# Altium PCB PCB_3.PcbDoc (part 1 of 2)
Units mm, origin at the board's own origin, x right, y up, seen from the top; angles counter-clockwise.
Board outline 70 x 50 mm, 4 copper layers (Top Layer, Layer 1, Layer 2, Bottom Layer), stack 1.572 mm thick; 98 components, 78 nets, 374 pads, 168 vias.
Unrouted connection lines stored in the file: 79.
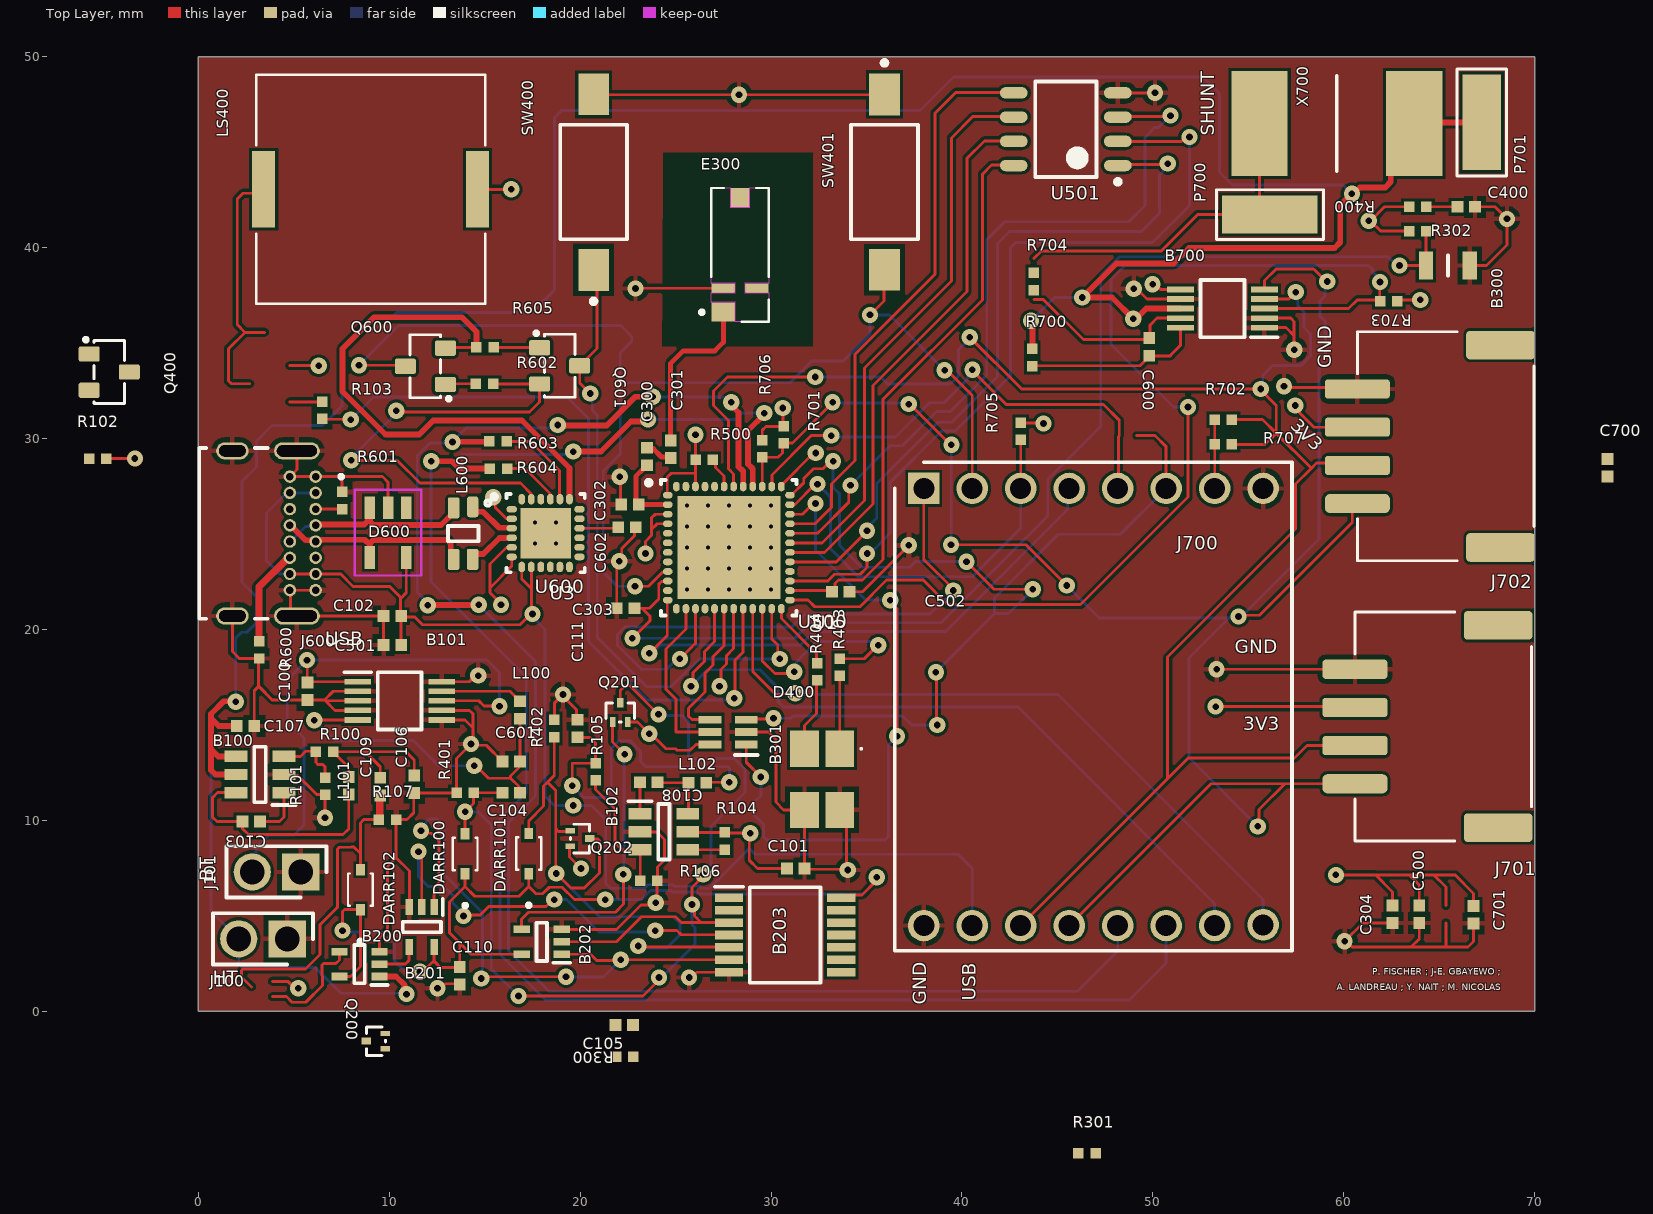
[diagram p0: Top Layer view]
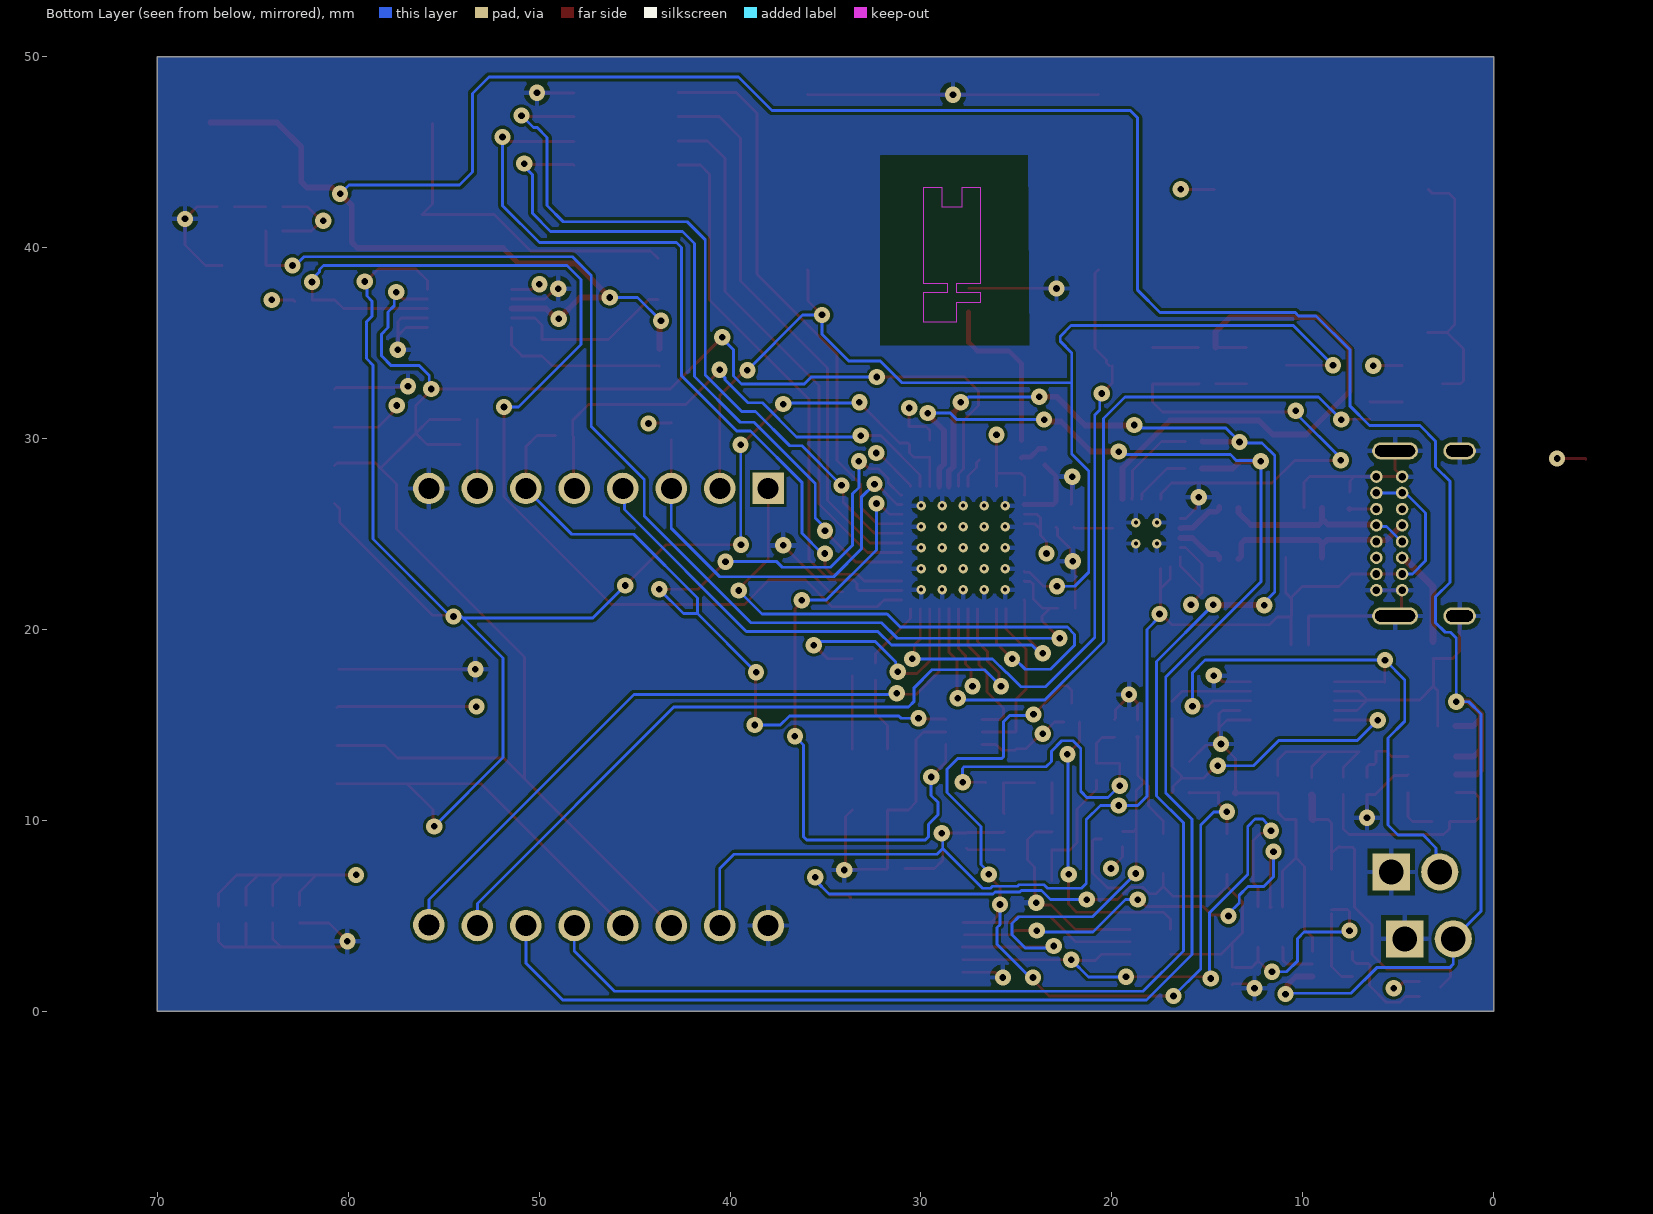
[diagram p1: Bottom Layer view, seen from below]
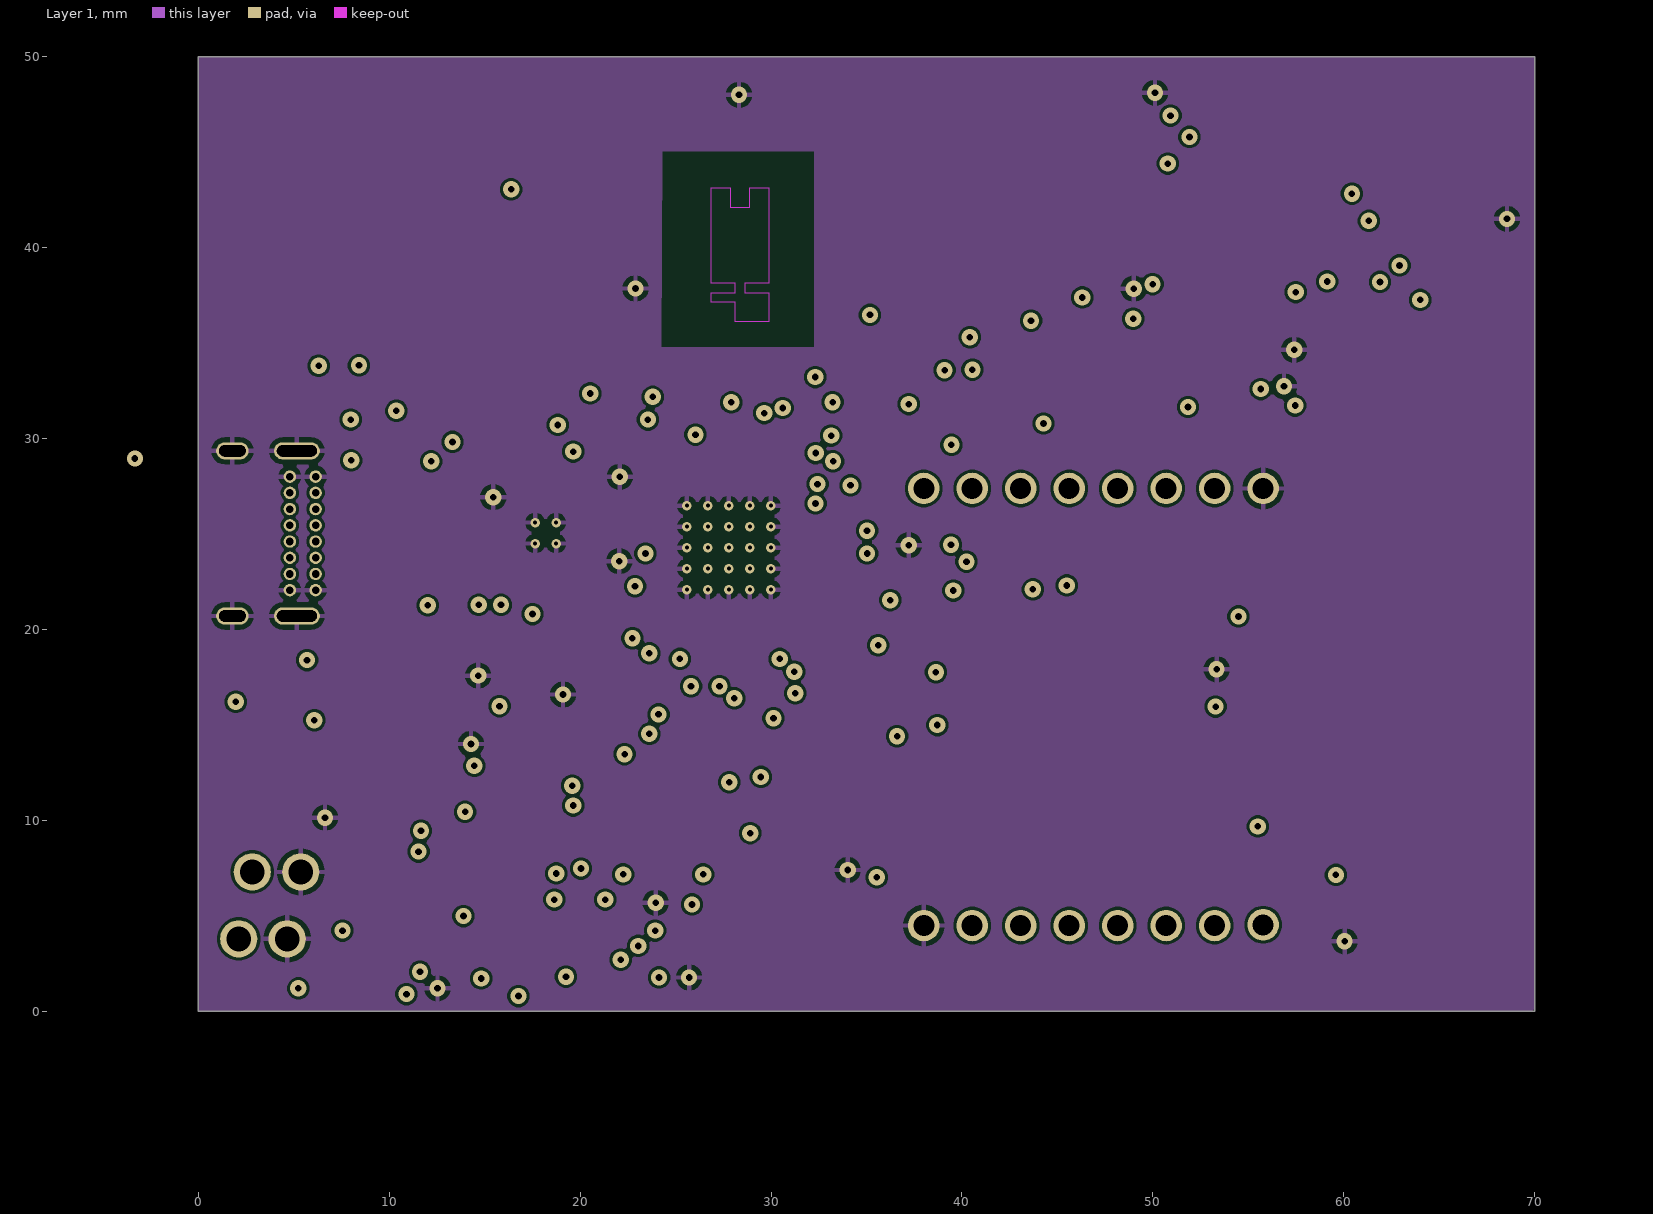
[diagram p2: Layer 1]
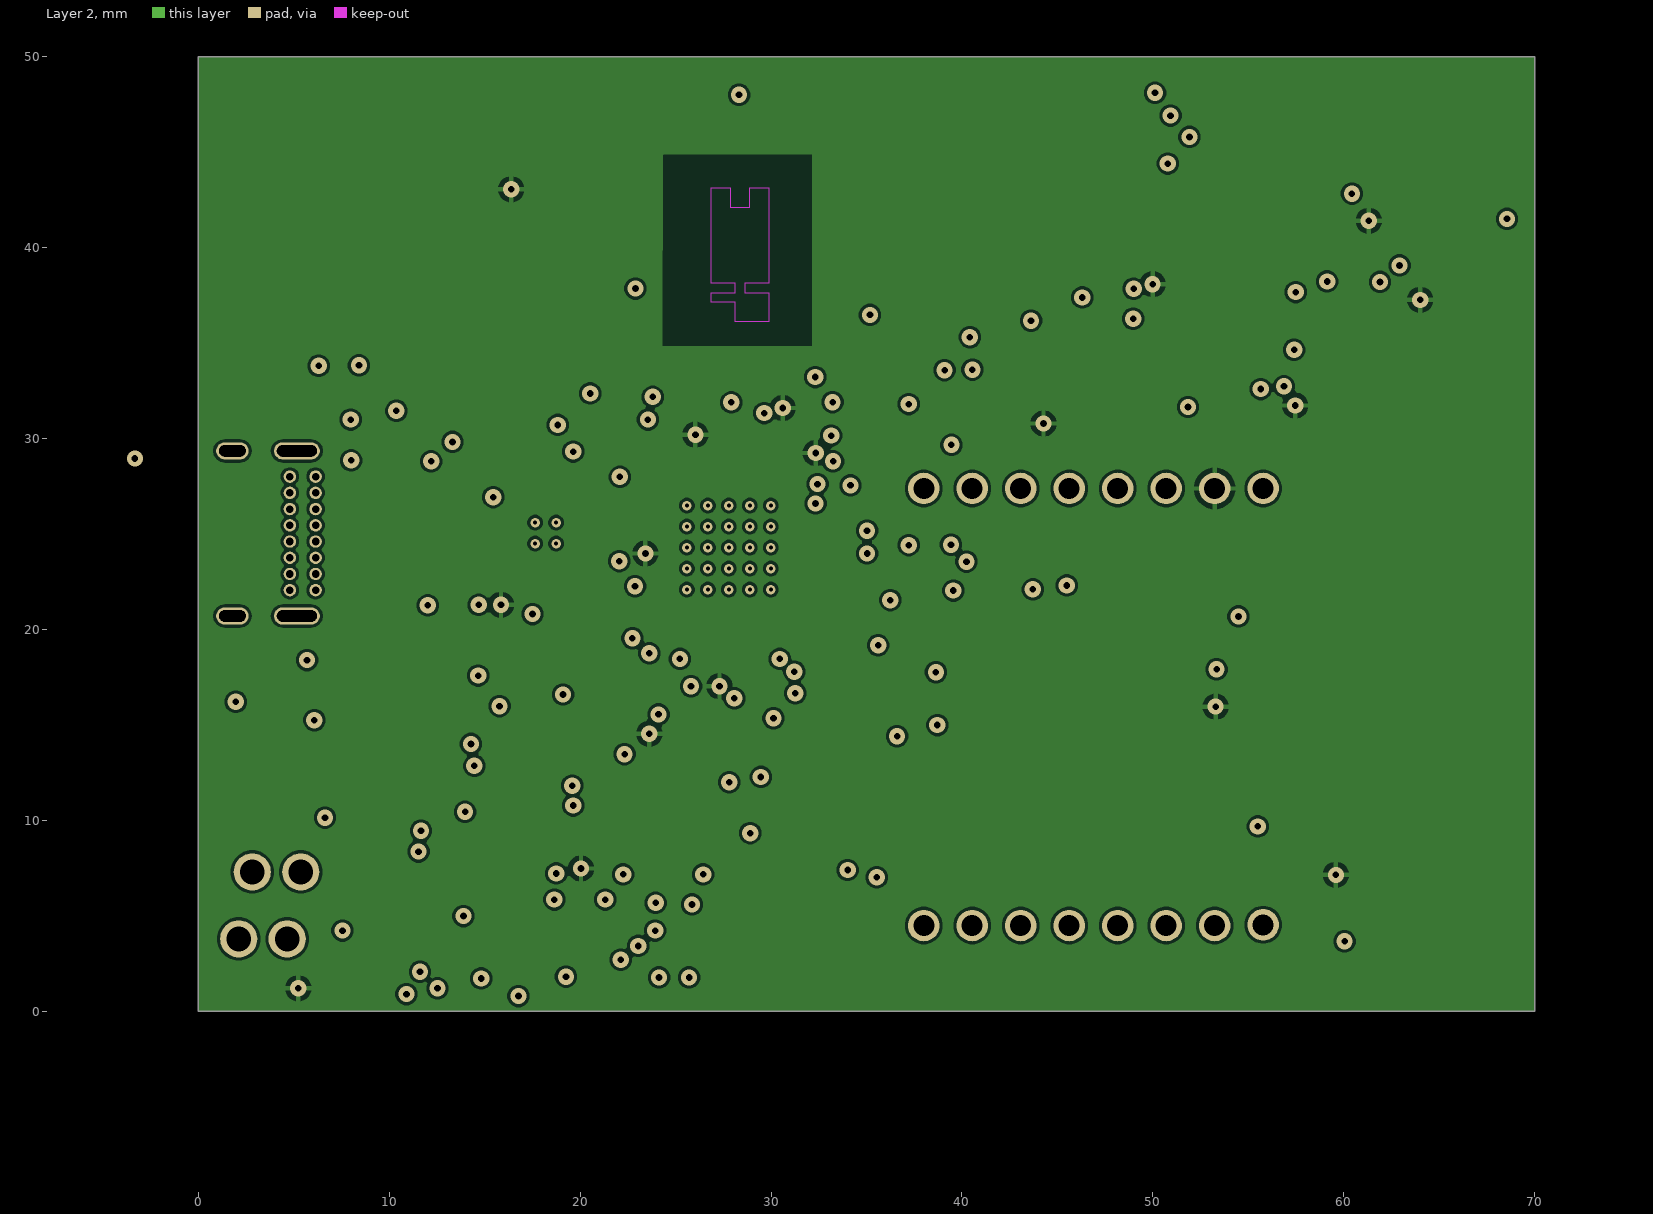
[diagram p3: Layer 2]

## Layer stack, top to bottom
Top Solder: solder mask 0.01, Solder Resist, Dk 3.5
Top Layer: signal copper 0.035
Dielectric 1: prepreg 0.1803, PP-021, Dk 4.7
Dielectric 2: prepreg 0.1803, PP-021, Dk 4.7
Layer 1: signal copper 0.035
Dielectric 3: core 0.711, Core-042, Dk 4.8
Layer 2: signal copper 0.035
Dielectric 4: prepreg 0.1803, PP-021, Dk 4.7
Dielectric 5: prepreg 0.1803, PP-021, Dk 4.7
Bottom Layer: signal copper 0.035
Bottom Solder: solder mask 0.01, Solder Resist, Dk 3.5

## Board outline
0,0 69.999,0 69.999,50 0,50

## Design rules (kind name [scope] priority, off if disabled: settings)
Clearance Clearance_OLTTTPPP [OnOutside] p1: gap=0.15 ignorepadtopadclearanceinfootprint=TRUE
Clearance Clearance_ILTTTPPP [All] p2: gap=0.15 ignorepadtopadclearanceinfootprint=TRUE except(0.09: Arc-SMDPad Track-SMDPad; 0.2: Arc-Hole Track-Hole SMDPad-Hole THPad-Hole Via-Hole Fill-Hole Poly-Hole Region-Hole)
DiffPairsRouting "Schematic Differential Pairs Routing_7" [InNet('FILTRE_D_6_P')] p1: maxlimit=0.127 minlimit=0.127 mostfreqgap=0.127 toplayer_minwidth=0.303 toplayer_maxwidth=0.303 toplayer_prefwidth=0.303 midlayer1_minwidth=0.109 midlayer1_maxwidth=0.109 midlayer1_prefwidth=0.109 midlayer2_minwidth=0.109 midlayer2_maxwidth=0.109 midlayer2_prefwidth=0.109 bottomlayer_minwidth=0.303 bottomlayer_maxwidth=0.303 bottomlayer_prefwidth=0.303 impedanceprofiledriven=TRUE impedanceprofileid={AF31A497-00BC-4CFA-BE3F-A0478A3B4F41} impedanceprofilevalue=90.000000 maxuncoupledlength=12.7
DiffPairsRouting "Schematic Differential Pairs Routing_6" [InNet('USB_D_6_P')] p2: maxlimit=0.127 minlimit=0.127 mostfreqgap=0.127 toplayer_minwidth=0.303 toplayer_maxwidth=0.303 toplayer_prefwidth=0.303 midlayer1_minwidth=0.109 midlayer1_maxwidth=0.109 midlayer1_prefwidth=0.109 midlayer2_minwidth=0.109 midlayer2_maxwidth=0.109 midlayer2_prefwidth=0.109 bottomlayer_minwidth=0.303 bottomlayer_maxwidth=0.303 bottomlayer_prefwidth=0.303 impedanceprofiledriven=TRUE impedanceprofileid={AF31A497-00BC-4CFA-BE3F-A0478A3B4F41} impedanceprofilevalue=90.000000 maxuncoupledlength=12.7
DiffPairsRouting "Schematic Differential Pairs Routing_5" [InNet('USB_D_6_N')] p3: maxlimit=0.127 minlimit=0.127 mostfreqgap=0.127 toplayer_minwidth=0.303 toplayer_maxwidth=0.303 toplayer_prefwidth=0.303 midlayer1_minwidth=0.109 midlayer1_maxwidth=0.109 midlayer1_prefwidth=0.109 midlayer2_minwidth=0.109 midlayer2_maxwidth=0.109 midlayer2_prefwidth=0.109 bottomlayer_minwidth=0.303 bottomlayer_maxwidth=0.303 bottomlayer_prefwidth=0.303 impedanceprofiledriven=TRUE impedanceprofileid={AF31A497-00BC-4CFA-BE3F-A0478A3B4F41} impedanceprofilevalue=90.000000 maxuncoupledlength=12.7
DiffPairsRouting "Schematic Differential Pairs Routing_4" [InNet('FILTRE_D_6_N')] p4: maxlimit=0.127 minlimit=0.127 mostfreqgap=0.127 toplayer_minwidth=0.303 toplayer_maxwidth=0.303 toplayer_prefwidth=0.303 midlayer1_minwidth=0.109 midlayer1_maxwidth=0.109 midlayer1_prefwidth=0.109 midlayer2_minwidth=0.109 midlayer2_maxwidth=0.109 midlayer2_prefwidth=0.109 bottomlayer_minwidth=0.303 bottomlayer_maxwidth=0.303 bottomlayer_prefwidth=0.303 impedanceprofiledriven=TRUE impedanceprofileid={AF31A497-00BC-4CFA-BE3F-A0478A3B4F41} impedanceprofilevalue=90.000000 maxuncoupledlength=12.7
DiffPairsRouting [All] p5: maxlimit=0.254 minlimit=0.254 mostfreqgap=0.254 toplayer_minwidth=0.381 toplayer_maxwidth=0.381 toplayer_prefwidth=0.381 midlayer1_minwidth=0.381 midlayer1_maxwidth=0.381 midlayer1_prefwidth=0.381 midlayer2_minwidth=0.381 midlayer2_maxwidth=0.381 midlayer2_prefwidth=0.381 bottomlayer_minwidth=0.381 bottomlayer_maxwidth=0.381 bottomlayer_prefwidth=0.381 maxuncoupledlength=12.7
HoleSize [All] p1: absolutevalues=TRUE maxlimit=1000 minlimit=0.2 maxpercent=80.000 minpercent=20.000
HoleToHoleClearance HoleToHoleClearance_uVia_same_layer_inner [IsMicroVia and ((StartLayer = 'Inner 1') and (StopLayer = 'Inner 2')) vs IsMicroVia and ((StartLayer = 'Inner 1') and (StopLayer = 'Inner 2'))] p1: gap=0.2 allowstackedmicrovias=FALSE
HoleToHoleClearance HoleToHoleClearance_uVia_same_layer_top [IsMicroVia and ((StartLayer = 'Top Layer') and (StopLayer = 'Inner 1')) vs IsMicroVia and ((StartLayer = 'Top Layer') and (StopLayer = 'Inner 1'))] p2: gap=0.2 allowstackedmicrovias=FALSE
HoleToHoleClearance HoleToHoleClearance_uVia [IsMicroVia vs IsMicroVia] p3: gap=0.01 allowstackedmicrovias=FALSE
HoleToHoleClearance [All] p4: gap=0.2 allowstackedmicrovias=FALSE
MinimumAnnularRing MinimumAnnularRing_uVia [IsMicroVia] p1: minimumring=0.09
MinimumAnnularRing MinimumAnnularRing_OAR [OnOutside] p2: minimumring=0.125
MinimumAnnularRing MinimumAnnularRing_IAR [All] p3: minimumring=0.125
MinimumSolderMaskSliver [All] p1: minsoldermaskwidth=0.149
NetAntennae [All] p1: netantennaetolerance=10
PolygonConnect [All] p1: connectstyle=Relief reliefconductorwidth=0.254 reliefentries=4 polygonreliefangle="90 Angle" airgapwidth=0.254
RoutingVias [All] p1: holewidth=0.35 width=0.85 viastyle="Through Hole" minholewidth=0.34 minwidth=0.84 maxholewidth=0.36 maxwidth=0.86
RoutingVias RoutingVias_uVia [IsMicroVia] p2: holewidth=0.1 width=0.28 viastyle="Through Hole" minholewidth=0.1 minwidth=0.28 maxholewidth=0.1 maxwidth=0.28
SilkToSolderMaskClearance [IsPad] p1: minsilkscreentomaskgap=0.124 clearancetoexposedcopper=TRUE
SolderMaskExpansion [All] p1: expansion=0 istentingtop=FALSE
SupplyNets "Schematic Supply Nets_11" [InNet('NOT_3V3_USB')] p1: voltage=0.000
SupplyNets "Schematic Supply Nets_10" [InNet('USB')] p2: voltage=0.000
SupplyNets "Schematic Supply Nets_9" [InNet('GND')] p3: voltage=0.000
SupplyNets "Schematic Supply Nets_8" [InNet('BT')] p4: voltage=0.000
SupplyNets "Schematic Supply Nets_7" [InNet('3V3_Logique')] p5: voltage=0.000
SupplyNets "Schematic Supply Nets_6" [InNet('VDDA')] p6: voltage=0.000
SupplyNets "Schematic Supply Nets_5" [InNet('3V3_BT')] p7: voltage=0.000
SupplyNets "Schematic Supply Nets_4" [InNet('3V3_HT')] p8: voltage=0.000
SupplyNets "Schematic Supply Nets_3" [InNet('3V3_USB')] p9: voltage=0.000
SupplyNets "Schematic Supply Nets_2" [InNet('NOT_3V3_BT')] p10: voltage=0.000
SupplyNets "Schematic Supply Nets_1" [InNet('HT')] p11: voltage=0.000
SupplyNets "Schematic Supply Nets" [InNet('3V3')] p12: voltage=0.000
ViasUnderSMD [IsMicroVia] p1: allowed=TRUE
Width "Schematic Width Constraint_1" [InNet('NetC300_2')] p1: maxlimit=0.624 minlimit=0.352 preferedwidth=0.624 toplayer_minwidth=0.624 impedanceprofiledriven=TRUE impedanceprofileid={634E063D-215B-4283-ACFF-58841ED45AF4} impedanceprofilevalue=50.000000 minimp=50.000000 maximp=50.000000 favimp=50.000000 checkconnectedcopper=TRUE
Width "Schematic Width Constraint" [InNet('NetC301_2')] p2: maxlimit=0.624 minlimit=0.352 preferedwidth=0.624 toplayer_minwidth=0.624 impedanceprofiledriven=TRUE impedanceprofileid={634E063D-215B-4283-ACFF-58841ED45AF4} impedanceprofilevalue=50.000000 minimp=50.000000 maximp=50.000000 favimp=50.000000 checkconnectedcopper=TRUE
Width Width_ILTW [All] p3: maxlimit=3 minlimit=0.15 preferedwidth=0.15
24 further rules are at their usual default settings.

## Classes and differential pairs
component class USB: C601 C602 C700 D600 J600 L600 Q600 Q601 R600 R601 R602 R603 R604 R605 U600
component class Logique_Prio_Alim: B200 B201 B202 B203 Q200 Q201 Q202
component class IHM: C400 D400 LS400 Q400 R400 R401 R402 R403 R404 SW400 SW401
component class I2C: B700 C600 C701 J700 J701 J702 P700 P701 R700 R701 R702 R703 R704 R705 R706 R707 X700
component class ESP32_SRAM: C500 C501 C502 R500 U500 U501
component class Converti_Alim: B100 B101 B102 C100 C101 C102 C103 C104 C105 C106 C107 C108 C109 C110 C111 DARR100 DARR101 DARR102 J100 J101 L100 L101 L102 R100 R101 R102 R103 R104 R105 R106 R107
component class Capteurs_et_Antenne: B300 B301 C300 C301 C302 C303 C304 E300 R300 R301 R302
differential pair USB_D_6: +USB_D_6_P -USB_D_6_N
differential pair FILTRE_D_6: +FILTRE_D_6_P -FILTRE_D_6_N

## Components (designator, comment, footprint, x,y, rotation, side; value= is the part's Value field where it differs from the comment)
B100 "LMR50410Y3FQDBVRQ1" SOT95P280X145-6N 3.226,12.395 r180 top
B101 "TPS62056DGSG4" SOP50P490X110-10N 10.541,16.256 r0 top
B102 "LMR50410Y3FQDBVRQ1" SOT95P280X145-6N 24.384,9.398 r0 top
B200 "MC74VHC1GT08DFT2G" SOT65P210X110-5N 8.433,2.464 r180 top
B201 "MC74VHC1GT08DFT2G" SOT65P210X110-5N 11.699,4.403 r270 top
B202 "MC74VHC1GT08DFT2G" SOT65P210X110-5N 17.983,3.632 r180 top
B203 "74VHC05FT" SOP65P640X120-14N 30.734,3.988 r0 top
B300 "NB12K00103JBB" RESC2212X50N 65.456,39.065 r0 top (schematic designator B400)
B301 "TMP126DCKR" SOT65P210X110-6N 27.747,14.62 r180 top (schematic designator B401)
B700 "INA237AIDGST" SOP50P490X110-10N 53.645,36.805 r180 top
C100 "10µF" CAPC1005X06N 5.715,16.764 r270 top
C101 "2.2µF" CAPC1005X06N 31.293,7.468 r0 top
C102 "22µF" CAPC1005X06N 10.16,20.701 r180 top
C103 "0.1µF" CAPC1005X06N 2.766,9.931 r180 top
C104 "0.01F" CAPC1005X06N 16.383,11.438 r180 top
C105 "0.01F" CAPC1005X06N 22.301,-0.737 r180 top
C106 "10µF" CAPC1005X06N 11.303,11.89 r270 top
C107 "2.2µF" CAPC1005X06N 2.464,14.935 r0 top
C108 "0.1µF" CAPC1005X06N 23.597,11.989 r0 top
C109 "0.01F" CAPC1005X06N 9.525,11.763 r270 top
C110 "10µF" CAPC1005X06N 13.691,1.854 r270 top
C111 "10µF" CAPC1005X06N 19.863,14.808 r90 top
C300 "0.6pF" CAPC1005X06N 23.495,29.058 r270 top
C301 "0.9pF" CAPC1005X06N 24.74,29.439 r90 top (schematic designator C400)
C302 "1pF" CAPC1005X06N 22.606,26.543 r0 top (schematic designator C401)
C303 "10nF" CAPC1005X06N 22.377,21.107 r180 top (schematic designator C402)
C304 "0.1µF" CAPC1005X06N 62.56,5.074 r270 top (schematic designator C403)
C400 "1µF" CAPC1005X06N 66.421,42.139 r0 top (schematic designator C404)
C500 "10µF" CAPC1005X06N 63.957,5.074 r270 top
C501 "100nF" CAPC1005X06N 10.16,19.177 r180 top
C502 "100nF" CAPC1005X06N 33.655,21.971 r0 top
C600 "100nF" CAPC1005X06N 49.809,34.798 r90 top
C601 "22µF" CAPC1005X06N 16.383,13.081 r180 top
C602 "4.7µF" CAPC1005X06N 22.454,25.349 r0 top
C700 "100nF" CAPC1005X06N 73.812,28.473 r90 top
C701 "100nF" CAPC1005X06N 66.802,5.055 r270 top
D400 "598-8610-207F" 5988610207F 32.675,12.141 r270 top (schematic designator D300)
D600 "824011" 824011 9.931,25.07 r180 top
DARR100 "SD103AWS-7-F" SD103AWS-7-F 13.97,8.238 r90 top
DARR101 "SD103AWS-7-F" SD103AWS-7-F 17.302,8.255 r90 top
DARR102 "SD103AWS-7-F" SD103AWS-7-F 8.484,6.359 r90 top
E300 "NN03-320" XCVR_NN03-320 28.372,39.624 r270 top (schematic designator E400)
J100 "61300211121" 61300211121 4.648,3.785 r180 top
J101 "61300211121" 61300211121 5.359,7.29 r180 top
J600 "Use" USB4085-GF-A 1.778,25.026 r270 top locked
J700 "825433-8" Connect-Mikrobus 37.998,27.381 r0 top
J701 "114020164" 114020164 64.389,14.91 r90 top
J702 "114020164" 114020164 64.516,29.591 r90 top
L100 "10µH" LQPC1005X06N 19.634,12.982 r270 top
L101 "3.3µH" LQPC1005X06N 5.08,14.605 r90 top
L102 "3.3µH" LQPC1005X06N 28.933,14.757 r0 top
L600 "Filtre en mode commun" 744232090 13.868,25.019 r270 top
LS400 "PKLCS1212E40A1-R1" SPKR_PKLCS1212E40A1-R1 9.017,43.053 r180 top (schematic designator LS300)
P700 "Plage CMS 10x5" "Plage CMS 10x5" 56.134,41.732 r180 top
P701 "Plage CMS 10x5" "Plage CMS 10x5" 67.234,46.558 r270 top
Q200 "SI3139K-TP" SI3139K-TP 9.296,-1.575 r90 top
Q201 "SI3139K-TP" SI3139K-TP 22.098,15.646 r0 top
Q202 "SI3139K-TP" SI3139K-TP 19.99,9.042 r270 top
Q400 "SS8050-G" SS8050-G -4.674,33.477 r270 top (schematic designator Q300)
Q600 "SS8050-G" SS8050-G 11.887,33.782 r90 top
Q601 "SS8050-G" SS8050-G 18.923,33.807 r270 top
R100 "51kΩ" RESC1005X06N 6.604,13.589 r180 top
R101 "22.1kΩ" RESC1005X06N 6.629,11.786 r90 top
R102 "1kΩ" RESC1005X06N -5.283,28.931 r0 top
R103 "1kΩ" RESC1005X06N 6.477,31.471 r90 top
R104 "100k" RESC1005X06N 27.584,8.915 r270 top
R105 "51kΩ" RESC1005X06N 20.803,12.548 r270 top
R106 "22.1kΩ" RESC1005X06N 23.597,6.833 r180 top
R107 "1kΩ" RESC1005X06N 9.906,10.033 r180 top
R300 "10kΩ" RESC1005X06N 22.327,-2.388 r0 top
R301 "10kΩ" RESC1005X06N 46.551,-7.442 r0 top
R302 "10kΩ" RESC1005X06N 63.881,40.869 r0 top
R400 "10kΩ" RESC1005X06N 63.881,42.139 r180 top (schematic designator R303)
R401 "1kΩ" RESC1005X06N 13.97,11.438 r0 top (schematic designator R304)
R402 "1kΩ" RESC1005X06N 18.644,14.808 r270 top (schematic designator R400)
R403 "330Ω" RESC1005X06N 33.604,18.009 r270 top (schematic designator R401)
R404 "330Ω" RESC1005X06N 32.41,17.78 r270 top (schematic designator R402)
R500 "0Ω" RESC1005X06N 26.492,28.88 r0 top
R600 "5.1kΩ" RESC1005X06N 3.175,18.923 r90 top
R601 "5.1kΩ" RESC1005X06N 7.544,26.746 r270 top
R602 "12kΩ" RESC1005X06N 14.986,32.868 r0 top
R603 "470Ω" RESC1005X06N 15.697,29.845 r0 top
R604 "470Ω" RESC1005X06N 15.723,28.423 r0 top
R605 "12kΩ" RESC1005X06N 15.011,34.773 r180 top
R700 "10Ω" RESC1005X06N 43.688,34.239 r90 top
R701 "4.7kΩ" RESC1005X06N 30.658,30.201 r270 top
R702 "4.7kΩ" RESC1005X06N 53.696,30.988 r0 top
R703 "10kΩ" RESC1005X06N 62.357,37.186 r0 top
R704 "10Ω" RESC1005X06N 43.764,38.227 r90 top
R705 "100kΩ" RESC1005X06N 43.078,30.378 r90 top
R706 "2kΩ" RESC1005X06N 29.54,29.464 r270 top
R707 "2kΩ" RESC1005X06N 53.696,29.693 r0 top
SW400 "FSMSM" TECO-FSMSM-2_V 20.701,43.434 r90 top (schematic designator SW300)
SW401 "FSMSM" TECO-FSMSM-2_V 35.941,43.434 r270 top (schematic designator SW301)
U500 "ESP32-PICO-D4" PQFN50P700X700X104_HS-49N 27.788,24.282 r0 top
U501 "IS66WVS1M8BLL-104NLI" SOIC127P600X175-8N 45.441,46.203 r180 top
U600 "CP2104-F03-GM" PQFN50P400X400X80_HS-25N 18.186,25.044 r0 top
X700 "PSR400ITQFF0L50" RESC10052X200N 59.639,46.507 r0 top

## Footprints (in the part's own frame and the unit in brackets; to place one, negate y for a bottom-side part, rotate by r counter-clockwise, add the part's x,y. Pads: shape width x height; smd on the part's side, far side on the other; paste and mask are expansions set on the pad)
824011 [mil] "Suppresseurs ESD / diodes TVS WE-TVS High Speed 5uA 5VDC 2+1"
  rect 21.65x47.24 smd: 1(-37.4,-51.18) 2(0,-51.18) 3(37.4,-51.18) 4(37.4,51.18) 5(-37.5,51)
  Top Layer keep-out lines w5: 68.9,88.58 -68.9,88.58 -68.9,-88.58 68.9,-88.58 68.9,88.58
  body extent -57,-55 57,55, height 57
114020164 [mm]
  rrect50% 1x3.4 smd: 1(-3,3.8)
  rrect30% 1x3.4 smd: 2(-1,3.8) 3(1,3.8) 4(3,3.8)
  rrect26% 1.5x3.6 smd: MP1(-5.3,-3.7) MP2(5.3,-3.7)
  silkscreen extent -6,-5.45 6,3.8, body extent -6.1,-5.59 5.9,4.59, height 5.2
744232090 [mm]
  rrect50% 1.1x0.6 smd: 1(-1.4,0.5)
  rrect33% 1.1x0.6 smd: 2(1.35,0.5) 3(1.35,-0.5) 4(-1.35,-0.5)
  silkscreen extent -1.74,-0.8 0.4,1.44, body extent -1.6,-0.8 1.6,0.8, height 1.8
5988610207F [mm]
  rect 1.9x1.5 smd: 1(-1.6,0.925) 2(1.6,0.925) 3(-1.6,-0.925) 4(1.6,-0.925)
  silkscreen extent -1.65,2 -1.55,2.1, body extent -1.6,-1.35 1.6,1.35, height 0.9
61300211121 [mm] "Embases et logements de câbles WR-PHD 2.54mm 2Pin T HT Header"
  rect 1.95x1.95 / inner round 1.95 / far side rect 1.95x1.95 hole 1.3: 1(0,0)
  round 1.95 hole 1.3: 2(2.54,0)
  silkscreen extent -1.35,-1.35 3.89,1.35
CAPC1005X06N [mm] "Chip Capacitor, 2-Leads, Body 1,00x0,50mm, IPC Medium Density"
  rect 0.62x0.62 smd: 1(-0.46,0) 2(0.46,0)
  body extent -0.53,-0.28 0.53,0.28, height 0.55
Connect-Mikrobus [mm]
  rect 1.65x1.65 / inner round 1.65 / far side rect 1.65x1.65 hole 1.1: 1(0,0)
  round 1.65 hole 1.1: 2(2.54,0) 3(5.08,0) 4(7.62,0) 5(10.16,0) 6(12.7,0) 7(15.24,0) 8(17.78,0) 9(17.78,-22.86) 10(15.24,-22.9) 11(12.7,-22.9) 12(10.16,-22.9) 13(7.62,-22.9) 14(5.08,-22.9) 15(2.54,-22.9) 16(0,-22.9)
  silkscreen extent -1.52,-24.22 19.3,1.37, body extent -1.37,-24.18 19.14,1.28, height 6.7
LQPC1005X06N [mm]
  rect 0.62x0.62 smd: 1(-3.254,-2.794) 2(-2.334,-2.794)
  body extent -3.32,-3.07 -2.27,-2.52, height 0.55
"Plage CMS 10x5" [mm] "Plage CMS 10x5"
  rect 5x2 smd paste-1 mask+0.15: 1(0,0)
  silkscreen extent -2.8,-1.3 2.8,1.3
PQFN50P400X400X80_HS-25N [mm] "PQFN, 24-Leads, Body 4,00x4,00mm, Pitch 0,50mm, Thermal Pad 2,65x2,65mm, IPC Medium Density"
  oval 0.55x0.35 smd: 1(-1.775,1.25) 2(-1.775,0.75) 3(-1.775,0.25) 4(-1.775,-0.25) 5(-1.775,-0.75) 6(-1.775,-1.25) 13(1.775,-1.25) 14(1.775,-0.75) 15(1.775,-0.25) 16(1.775,0.25) 17(1.775,0.75) 18(1.775,1.25)
  oval 0.35x0.55 smd: 7(-1.25,-1.775) 8(-0.75,-1.775) 9(-0.25,-1.775) 10(0.25,-1.775) 11(0.75,-1.775) 12(1.25,-1.775) 19(1.25,1.775) 20(0.75,1.775) 21(0.25,1.775) 22(-0.25,1.775) 23(-0.75,1.775) 24(-1.25,1.775)
  rect 2.65x2.65 smd: 25(0,0)
  silkscreen extent -2.82,-2.05 2.05,2.05, body extent -2.05,-2.05 2.05,2.05, height 0.8
PQFN50P700X700X104_HS-49N [mm] "PQFN, 48-Leads, Body 7,00x7,00mm, Pitch 0,50mm, Thermal Pad 5,40x5,40mm, IPC Medium Density"
  oval 0.5x0.35 smd: 1(-3.2,2.75) 2(-3.2,2.25) 3(-3.2,1.75) 4(-3.2,1.25) 5(-3.2,0.75) 6(-3.2,0.25) 7(-3.2,-0.25) 8(-3.2,-0.75) 9(-3.2,-1.25) 10(-3.2,-1.75) 11(-3.2,-2.25) 12(-3.2,-2.75) 25(3.2,-2.75) 26(3.2,-2.25) 27(3.2,-1.75) 28(3.2,-1.25) 29(3.2,-0.75) 30(3.2,-0.25) 31(3.2,0.25) 32(3.2,0.75) 33(3.2,1.25) 34(3.2,1.75) 35(3.2,2.25) 36(3.2,2.75)
  oval 0.35x0.5 smd: 13(-2.75,-3.2) 14(-2.25,-3.2) 15(-1.75,-3.2) 16(-1.25,-3.2) 17(-0.75,-3.2) 18(-0.25,-3.2) 19(0.25,-3.2) 20(0.75,-3.2) 21(1.25,-3.2) 22(1.75,-3.2) 23(2.25,-3.2) 24(2.75,-3.2) 37(2.75,3.2) 38(2.25,3.2) 39(1.75,3.2) 40(1.25,3.2) 41(0.75,3.2) 42(0.25,3.2) 43(-0.25,3.2) 44(-0.75,3.2) 45(-1.25,3.2) 46(-1.75,3.2) 47(-2.25,3.2) 48(-2.75,3.2)
  rect 5.4x5.4 smd: 49(0,0)
  silkscreen extent -4.32,-3.55 3.55,3.55, body extent -3.55,-3.55 3.55,3.55, height 1.04
RESC1005X06N [mm] "Chip Resistor, 2-Leads, Body 1,00x0,50mm, IPC Medium Density"
  rect 0.55x0.55 smd: 1(-0.45,0) 2(0.45,0)
  body extent -0.53,-0.28 0.53,0.28, height 0.55
RESC2212X50N [mm]
  rect 0.75x1.45 smd: 1(-1.15,0) 2(1.15,0)
  silkscreen extent 0,-0.53 0,0.53, body extent -1.07,-0.63 1.07,0.63, height 0.5
RESC10052X200N [mm]
  rect 2.95x5.5 smd: 1(-4.05,0) 2(4.05,0)
  silkscreen extent 0,-2.5 0,2.5, body extent -5,-2.6 5,2.6, height 2
SD103AWS-7-F [mm]
  rect 0.6x0.46 smd: 1(-1.05,0) 2(1.05,0)
  silkscreen extent -2.81,-0.65 0.85,0.65, body extent -1.25,-0.65 1.25,0.65, height 1.2
SI3139K-TP [mm] "MOSFET P-Channel MOSFET"
  rect 0.28x0.5 smd paste+0 mask+0.075: 1(-0.4,-0.5) 2(0.4,-0.5)
  rect 0.36x0.5 smd paste+0 mask+0.075: 3(0,0.5)
  silkscreen extent -0.75,-0.5 0.75,0.5, body extent -0.6,-0.6 0.6,0.6, height 0.55
SOIC127P600X175-8N [mm] "SOIC, 8-Leads, Body 4,90x3,90mm, Pitch 1,27mm, IPC Medium Density"
  oval 1.45x0.6 smd: 1(-2.725,1.905) 2(-2.725,0.635) 3(-2.725,-0.635) 4(-2.725,-1.905) 5(2.725,-1.905) 6(2.725,-0.635) 7(2.725,0.635) 8(2.725,1.905)
  silkscreen extent -2.85,-2.5 1.6,2.88, body extent -3,-2.5 3,2.5, height 1.75
SOP50P490X110-10N [mm]
  rect 1.4x0.3 smd: 1(-2.2,1) 2(-2.2,0.5) 3(-2.2,0) 4(-2.2,-0.5) 5(-2.2,-1) 6(2.2,-1) 7(2.2,-0.5) 8(2.2,0) 9(2.2,0.5) 10(2.2,1)
  silkscreen extent -2.9,-1.5 1.15,1.5, body extent -2.46,-1.5 2.46,1.5, height 1.06
SOP65P640X120-14N [mm]
  rect 1.475x0.45 smd: 1(-2.938,1.95) 2(-2.938,1.3) 3(-2.938,0.65) 4(-2.938,0) 5(-2.938,-0.65) 6(-2.938,-1.3) 7(-2.938,-1.95) 8(2.938,-1.95) 9(2.938,-1.3) 10(2.938,-0.65) 11(2.938,0) 12(2.938,0.65) 13(2.938,1.3) 14(2.938,1.95)
  silkscreen extent -3.68,-2.5 1.85,2.52, body extent -3.1,-2.75 3.3,2.75, height 1.1
SOT65P210X110-5N [mm]
  rect 0.85x0.4 smd: 1(-1.05,0.65) 2(-1.05,0) 3(-1.05,-0.65) 4(1.05,-0.65) 5(1.05,0.65)
  silkscreen extent -1.47,-1 0.28,1.1, body extent -0.95,-1 1.15,1, height 1.1
SOT65P210X110-6N [mm]
  rect 1.2x0.4 smd: 1(-0.95,0.65) 2(-0.95,0) 3(-0.95,-0.65) 4(0.95,-0.65) 5(0.95,0) 6(0.95,0.65)
  silkscreen extent -1.55,1.2 -0.35,1.2, body extent -1.05,-1 1.05,1, height 1
SOT95P280X145-6N [mm]
  rect 1.2x0.6 smd: 1(-1.25,0.95) 2(-1.25,0) 3(-1.25,-0.95) 4(1.25,-0.95) 5(1.25,0) 6(1.25,0.95)
  silkscreen extent -1.85,-1.45 0.3,1.6, body extent -1.4,-1.45 1.4,1.45, height 1.2
SPKR_PKLCS1212E40A1-R1 [mm]
  rect 1.2x4 smd: N(5.6,0) P(-5.6,0)
  silkscreen extent -6,-6 6,6, body extent -6,-6 6,6, height 3
SS8050-G [mm]
  rrect25% 0.8x1.1 smd paste+0 mask+0.075: 1(-0.95,-1.05) 2(0.95,-1.05) 3(0,1.05)
  silkscreen extent -1.77,-1.3 1.65,0.8, body extent -1.5,-1.3 1.5,1.3, height 1.1
TECO-FSMSM-2_V [mm] "SMD, 2-Leads, Body 6x3.5mm, Pitch 9.19mm"
  rect 2.2x1.6 smd: 1(-4.595,0)
  rect 2.18x1.6 smd: 2(4.595,0)
  silkscreen extent -6.37,-1.75 3,1.75, body extent -4.98,-1.75 4.98,1.75, height 4.4
USB4085-GF-A [mm]
  round 0.65 hole 0.4: A1(-2.975,4.36) A4(-2.125,4.36) A5(-1.275,4.36) A6(-0.425,4.36) A7(0.425,4.36) A8(1.275,4.36) A9(2.125,4.36) A12(2.975,4.36) B1(2.975,3.01) B4(2.125,3.01) B5(1.275,3.01) B6(0.425,3.01) B7(-0.425,3.01) B8(-1.275,3.01) B9(-2.125,3.01) B12(-2.975,3.01)
  oval 0.9x1.7 hole 0.6 slot 1.4 at 90 deg: S1(-4.325,0) S2(4.325,0)
  oval 0.9x2.4 hole 0.6 slot 2.1 at 90 deg: S3(-4.325,3.38) S4(4.325,3.38)
  silkscreen extent -4.47,-1.74 4.47,5.8, body extent -4.47,-4.25 4.47,4.92, height 3.46
XCVR_NN03-320 [mm]
  rect 1x1 smd: 1(-3,0)
  rect 0.5x1.25 smd: 2(1.75,-0.875) 4(1.75,0.875)
  rect 1x1.25 smd: 3(3,-0.875)
  Keep-Out Layer region: 3.5,-0.25 2.5,-0.25 2.5,-1.5 2,-1.5 2,-0.25 1.5,-0.25 1.5,-1.5 -3.5,-1.5 -3.5,-0.5 -2.5,-0.5 -2.5,0.5 -3.5,0.5 -3.5,1.5 1.5,1.5 1.5,0.25 2,0.25 2,1.5 3.5,1.5
  silkscreen extent -3.5,-2.1 3.5,1.5, body extent -3.5,-1.5 3.5,1.5, height 2.02

## Part data
B100 B102: "Régulateurs de tension de commutation Automotive qualified SIMPLE SWITCHER 4-V to 36-V, 1-A synchronous step-down converter 6-SOT-23 -40 to 150", Manufacturer_Name="Texas Instruments", Mouser Part Number=595-R50410Y3FQDBVRQ1, Manufacturer_Part_Number=LMR50410Y3FQDBVRQ1
B101: "TEXAS INSTRUMENTS - TPS62056DGSG4 - Synchronous Buck (Step Down) Switching Regulator, Fixed, 2.7V-10Vin, 3.3V/0.8A out, 850kHz, VSSOP-10", Manufacturer_Name="Texas Instruments", Mouser Part Number=595-TPS62056DGSG4, Manufacturer_Part_Number=TPS62056DGSG4
B200 B201 B202: "Single 2-Input AND Gate, TTL Level", Manufacturer_Name=onsemi, Manufacturer_Part_Number=MC74VHC1GT08DFT2G
B203: "Logic Gates CMOS LOGIC IC INVERTER", Manufacturer_Name=Toshiba, Mouser Part Number=757-74VHC05FT, Manufacturer_Part_Number=74VHC05FT
B300: "CTN Capteur - NTC SMD Thermistor, NB12K, 10K, 5% AVX 10k 0805 Protection NTC Thermistor, 5s, 2 x 1.25 x 1.3mm", Manufacturer_Name="Kyocera AVX", Mouser Part Number=581-NB12K00103JBB, Arrow Part Number=NB12K00103JBB, Arrow Price/Stock=https://www.arrow.com/en/products/nb12k00103jbb/avx, Datasheet Link=https://datasheet.datasheetarchive.com/originals/distributors/Datasheets-DGA6/551314.pdf, Geometry.Height=0.5mm, Manufacturer_Part_Number=NB12K00103JBB, Mouser Price/Stock=https://www.mouser.co.uk/ProductDetail/AVX/NB12K00103JBB/?qs=4%252B6%252BTdINQeDPvI%252BQUQjJ3Q%3D%3D
B301: "Board Mount Temperature Sensors +/-0.25 C SPI temperature sensor with 175 C operation, CRC and slew-rate alert", Manufacturer_Name="Texas Instruments", Mouser Part Number=595-TMP126DCKR, Manufacturer_Part_Number=TMP126DCKR
B700: "Current Sense Amplifiers 85-V, 16-bit, I2C output current/voltage/power monitor with alert 10-VSSOP -40 to 125", Manufacturer_Name="Texas Instruments", Mouser Part Number=595-INA237AIDGST, Manufacturer_Part_Number=INA237AIDGST
C100 C101 C102 C103 C104 C105 C106 C107 C108 C109 C110 C111 C300 C301 C302 C303 C304 C400 C500 C501 C502 C600 C601 C602 C700 C701: library part Capacitor
D400: "Standard LEDs - SMD Red/Green WC 80/50mcd 645/570nm", Manufacturer_Name=Dialight, Mouser Part Number=645-598-8610-207F, Arrow Part Number=598-8610-207F, Arrow Price/Stock=https://www.arrow.com/en/products/598-8610-207f/dialight?region=nac, Datasheet Link=https://media.digikey.com/pdf/Data%20Sheets/Dialight%20PDFs/598%20Series%201210%20Pkg%20Bi-Color.pdf, Geometry.Height=0.8mm, Manufacturer_Part_Number=598-8610-207F, Mouser Price/Stock=https://www.mouser.co.uk/ProductDetail/Dialight/598-8610-207F?qs=7JStj%2FjQ2SFuCjosqwklHQ%3D%3D
D600: "TVS Diode Array WE-TVS, High Speed Series  - Low capazity - No leakage current - Low clamping voltage - high ESD voltage protection  -- USB 1.0 - 2.0"
DARR100 DARR101 DARR102: "Diode Array 3 Independent Schottky 40V 175mA Surface Mount 6-TSSOP, SC-88, SOT-363"
E300: "Dual port antenna booster for GNSS, Bluetooth, 5G and UWB (1561 - 1606MHz, 2400 - 2500MHz, 3400 - 3800MHz, 3100 - 4800MHz and 6000 - 10600 MHz), signal booster", Manufacturer_Name=Ignion, Mouser Part Number=128-NN03-320, Manufacturer_Part_Number=NN03-320
J100 J101: "WURTH ELEKTRONIK - 61300211121 - HEADER, 2.54MM, PIN, THT, VERTICAL, 2WAY"
J600: library part USB4085-GF-A, "Connecteurs USB USB Type C, 2.0, Rec, TH , G/F, RA , Top Mnt, T & R"
J700: library part Connect-Mikrobus, "Headers & Wire Housings 8P double for connection mikrobus", Manufacturer_Name="TE Connectivity", Mouser Part Number=571-825433-8, Manufacturer_Part_Number=825433-8
J701 J702: "Seeed Studio Accessories Grove Female Header - SMD-4P-2.0mm-90D-20Pcs", Manufacturer_Name="Seeed Studio", Mouser Part Number=713-114020164, Manufacturer_Part_Number=114020164
L100 L101 L102: library part Bobine
L600: library part 744232090, "Bobines / filtres en mode commun WE-CNSW 1206 370mA 90Ohm 100MHz AECQ200"
LS400: "Buzzers Transducer, Externally Driven Piezo 1.5V 2kHz 70dB @ 1.5V, 10cm Surface Mount Solder Pads", Package=None, Availability=Unavailable, MF="Murata Electronics", MP=PKLCS1212E40A1-R1, Price=None
P700 P701: "Plage de report CMS 10x5mm", Footprint_statut=ok, PN=L30
Q200 Q201 Q202: "MOSFET P-Channel MOSFET"
Q400 Q600 Q601: "Bipolar Transistors - BJT NPN TRANSISTOR 1.5A 40V"
R100 R101 R102 R103 R104 R105 R106 R107 R300 R301 R302 R400 R401 R402 R403 R404 R500 R600 R601 R602 R603 R604 R605 R700 R701 R702 R703 R704 R705 R706 R707: library part Resistor
SW400 SW401: library part CMP-2000-07511-1, "FSMSM Push Button Switch, 50 mA, -35 to 85 degC, 2-Pin SMD, RoHS, Bulk", Case\/Package=SMD/SMT, Contact Current Rating=50mA, Contact Resistance=100mOhm, Manufacturer="TE Connectivity", Max Operating Temperature=85degC, Max Voltage Rating (DC)=12V, Min Operating Temperature=-35degC, Operating Force=180gf, Package Description="2-Pin Surface Mount Device, Body 6 x 3.5 mm, Pitch 9.19 mm", Package Quantity=1000, Voltage Rating (DC)=24V, Actuator Length=1.07mm, Actuator Material=Polyamide, Contact Material=Brass, Contact Plating=Silver, Current Rating=50mA, Datasheet URL=http://www.te.com/commerce/DocumentDelivery/DDEController?Action=showdoc&DocId=Customer+Drawing%7F1437566-3%7FC2%7Fpdf%7FEnglish%7FENG_CD_1437566-3_C2_1437566_3_1_c.dwg.pdf%7F1437566-3, Datasheet Version="Rev. C2, 08/2014", Electrical Life=20000Cycles, ELV=Compliant, Illumination Type=Illuminated, Lead Free=LeadFree, Manufacturer URL=http://www.te.com/, Mechanical Life=20000Cycles, Mount=SurfaceMount, Mounting Technology=SurfaceMount, Orientation=Straight, Package Reference=FSMSM, Packaging=LoosePiece, REACH SVHC=Unknown, RoHSCompliant=true, Switch Travel=0.25mm, Termination=GullWing, Throw Configuration=SPST
U500: library part ESP32, "Système RF sur puce - SoC SIP module ESP32 with 4MByte Flash, Dual Core MCU, Wi-Fi & Bluetooth Combo, LGA48-pin, 7*7mm", Manufacturer 1="Espressif Systems", Supplier Part Number 1=1904-1029-1-ND, Manufacturer Part Number 1=ESP32-PICO-D4, Supplier 1=Digi-Key
U501: library part SRAM, "SRAM 8Mb, SerialRAM, 2.7V-3.6V, 104MHz, 8 pin SOIC 150 mil, RoHS", Manufacturer 1=ISSI, Supplier Part Number 1=706-IS66WVS1M8BLL-104NLI-ND, Manufactuer Part Number 1=IS66WVS1M8BLL-104NLI, Supplier 1=Digi-Key
U600: library part USBBridge, "USB Bridge, USB to UART USB 2.0 UART Interface 24-QFN (4x4)", Manufacturer 1="Silicon Labs", Manufacturer Part Number 1=CP2104-F03-GM, Supplier 1="Arrow Electronics", Supplier Part Number 1=CP2104-F03-GM
X700: "ROHM - PSR400ITQFF0L50 - SMD Current Sense Resistor, 500 ohm, PSR Series, 3921 [1052 Metric], 4 W, +/- 1%, Metal Strip", Manufacturer_Name="ROHM Semiconductor", Mouser Part Number=755-PSR400ITQFF0L50, Datasheet Link=https://componentsearchengine.com/Datasheets/2/PSR400ITQFF0L50.pdf, Geometry.Height=2mm, Manufacturer_Part_Number=PSR400ITQFF0L50, Mouser Price/Stock=https://www.mouser.co.uk/ProductDetail/ROHM-Semiconductor/PSR400ITQFF0L50?qs=493kPxzlxfLaT1w5Mo%252BtHg%3D%3D

## Via types
v1: diameter 0.85, hole 0.35, Top Layer to Bottom Layer, 139 vias
v2: diameter 0.5, hole 0.2, Top Layer to Bottom Layer, 29 vias

## Nets (pads, with @x,y where several pads share a name; then routed paths per layer and width w, separated by ;. In a path a pad name is that pad's centre, name@x,y a point inside that pad or via, vN(x,y) a via of type N, cw(c..) or ccw(c..) an arc to the next point about the centre after c; other vN are vias at no path point)
3V3: B301.6 B700.6 C304.1 C500.1 C501.1 C701.1 J700.7 J701.3 J702.3 LS400.P Q200.2 Q201.2 Q202.2 R300.1 R301.2 R400.2 R401.2 R500.1 R701.1 R702.1 R703.2 R705.2 R706.1 R707.1 U500.1 U500.3 U500.4 U500.19 U500.37 U500.46 U600.5 U600.6 | length 73.4
  Top Layer w0.15: -4.833,28.931 -4.812,28.952 v1(-3.332,28.952) ; 3.878,1.56 4.679,1.56 5.045,1.194 v1(5.232,1.194) ; LS400.P@14.617,43.053 v1(16.383,43.053) ; v1(15.85,21.285) 15.85,21.337 15.265,21.922 15.265,22.174 ; U600.6@16.411,23.794 16.411,23.32 15.265,22.174 ; U600.5@16.411,24.294 16.403,24.286 16.132,24.286 15.265,23.419 15.265,22.174 ; Q202.2@19.439,8.617 19.439,8.069 v1(20.041,7.468) ; Q201.2@22.498,15.146 23.004,15.146 v1(23.622,14.529) 23.715,14.529 24.499,13.744 24.998,13.744 25.016,13.726 25.016,13.72 ; v1(23.416,23.975) 23.416,24.602 23.741,24.927 23.741,25.235 ; U500.4@24.588,25.532 24.038,25.532 23.741,25.235 ; U500.3@24.588,26.032 23.929,26.032 23.741,25.845 23.741,25.235 ; U500.1@24.588,27.032 24.581,27.032 24.56,27.053 24.56,27.975 24.766,28.181 26.039,28.181 R500.1@26.039,28.877 ; 25.019,13.723 25.077,13.665 25.756,13.665 26.06,13.97 B301.6@26.797,13.97 ; U500.46@26.038,27.482 26.04,27.485 26.04,28.181 ; R500.1@26.038,28.88 v1@26.038,30.198 ; R500.1@26.04,28.877 R500.1@26.042,28.88 ; v1(27.294,17.021) 27.382,17.109 27.382,17.904 27.656,18.178 27.656,18.614 28.038,18.995 U500.19@28.038,21.082 ; R706.1@29.54,29.914 29.54,30.429 29.736,30.625 30.632,30.625 R701.1@30.658,30.651 30.632,30.676 v1@30.632,31.572 ; U500.37@30.538,27.482 30.538,27.545 32.228,29.235 v1(32.334,29.235) ; v1(30.607,31.598) v1@30.632,31.572 ; v1@30.711,31.493 v1@30.632,31.572 ; R705.2@43.078,30.828 43.099,30.807 44.25,30.807 v1(44.272,30.785) ; v1(49.987,38.084) 50.135,38.084 50.414,37.805 B700.6@51.445,37.805 ; R702.1@53.225,30.967 R702.1@53.246,30.988 R707.1@53.246,29.693 53.242,29.689 53.242,27.385 J700.7@53.238,27.381 J700.7@53.264,27.356 ; v1(53.289,15.951) 60.548,15.951 J701.3@60.589,15.91 ; v1(57.455,31.725) 57.52,31.659 57.52,31.507 58.436,30.591 J702.3@60.716,30.591 ; v1(59.588,7.137) 61.671,7.137 61.674,7.135 ; v1(61.316,41.402) v1@61.408,41.402 ; 61.874,7.135 61.674,7.135 ; 61.877,7.132 64.721,7.132 ; C304.1@62.563,5.537 62.563,6.246 61.674,7.135 ; R703.2@62.807,37.186 62.883,37.262 v1(64.008,37.262) ; 63.431,40.869 61.942,40.869 v1@61.408,41.402 ; R400.2@63.431,42.139 62.145,42.139 v1@61.408,41.402 ; 63.513,7.046 63.957,6.601 C500.1@63.957,5.534 ; 65.354,5.534 65.354,6.498 64.721,7.132 ; C701.1@66.802,5.515 66.802,6.169 65.84,7.132 64.721,7.132
  other v1: 26.035,30.201
3V3_BT: B202.2 B203.3 C104.2 DARR101.2 Q201.3 R102.2 | length 56.6
  Top Layer w0.15: 13.97,9.288 v1(13.97,10.439) ; v1@13.995,10.465 14.402,10.871 14.402,11.42 ; 14.42,11.438 C104.2@15.923,11.438 ; v1(16.764,0.787) 23.292,0.787 24.13,1.626 v1(24.13,1.765) ; B202.2@19.033,3.632 21.895,3.632 23.206,4.944 24.991,4.944 25.297,4.638 26.325,4.638 ; Q201.3@22.098,16.146 22.098,16.789 22.352,17.043 22.606,17.043 v1(24.105,15.545) ; v1(26.441,7.163) 26.441,7.061 25.857,6.477 v1(25.857,5.588) 25.991,5.454 25.991,4.986 26.114,4.863 26.114,4.849 26.325,4.638 ; B203.3@27.796,4.638 26.325,4.638
  Top Layer w0.203: 14.402,11.42 14.42,11.438
  Bottom Layer w0.15: v1(13.97,10.439) 14.656,10.439 15.339,9.756 15.339,2.212 v1(16.764,0.787) ; v1(24.105,15.545) 24.155,15.494 25.349,15.494 25.679,15.164 25.679,13.321 25.767,13.233 28.067,13.233 28.626,12.675 28.626,11.455 26.848,9.677 26.848,7.676 26.441,7.269 v1(26.441,7.163) ; v1(24.13,1.765) 24.269,1.765 26.01,3.505 26.01,4.376 25.857,4.528 v1(25.857,5.588)
3V3_HT: B201.1 C105.2 DARR100.2 Q200.3 R103.2
3V3_Logique: B200.5 B201.5 B202.5 B203.14 C110.1 DARR100.1 DARR101.1 DARR102.1 | length 50
  Top Layer w0.15: B200.5@7.383,1.814 7.964,1.814 8.484,2.333 DARR102.1@8.484,5.107 ; v1(7.544,4.216) 7.544,5.212 7.653,5.321 8.406,5.321 8.419,5.309 DARR102.1@8.484,5.309 ; v1(11.605,2.06) 11.753,2.06 12.268,2.575 12.313,2.575 12.349,2.612 ; B201.5@12.349,3.353 12.349,2.612 ; C110.1@13.538,2.292 12.669,2.292 12.349,2.612 ; C110.1@13.691,2.314 13.691,3.572 ; DARR100.1@13.97,7.188 13.97,6.528 ; B202.5@16.933,2.982 14.281,2.982 13.691,3.572 ; DARR101.1@17.302,7.205 17.302,6.525 ; v1(21.311,5.842) 19.693,5.842 19.043,6.492 18.374,6.492 18.029,6.147 17.68,6.147 17.302,6.525 ; B203.14@33.672,5.938 33.822,6.088 34.764,6.088 35.535,6.858 v1(35.535,7.01) ; 13.691,3.572 13.155,4.108 13.155,5.713 13.97,6.528 ; 13.97,6.528 14.478,6.02 16.797,6.02 17.302,6.525
  Bottom Layer w0.15: v1(7.544,4.216) 7.62,4.14 9.931,4.14 10.262,3.81 10.262,2.642 10.843,2.06 v1(11.605,2.06) ; v1(21.311,5.842) 23.204,5.842 23.683,6.321 24.739,6.321 24.822,6.238 26.126,6.238 26.229,6.135 34.812,6.135 35.535,6.858 v1(35.535,7.01)
3V3_USB: B203.5 C109.2 DARR102.2 Q202.1 Q202.3 R107.2 | length 17.6
  Top Layer w0.15: 2.778,1.27 2.259,1.789 2.259,2.122 2.347,2.21 5.613,2.21 6.375,2.972 6.375,4.527 7.29,5.441 7.29,8.497 7.378,8.585 8.001,8.585 8.015,8.599 8.139,8.599 8.484,8.255 ; DARR102.2@8.484,7.417 8.484,8.255 ; R107.2@9.456,10.033 8.662,10.033 8.484,9.854 8.484,8.255
  Top Layer w0.381: R107.2@9.456,10.033 9.491,10.068 9.491,11.268 C109.2@9.525,11.303
BT: B101.1 B101.8 C100.1 J101.2 | length 32.9
  Top Layer w0.15: v1(5.69,18.39) 5.702,18.377 5.702,17.237 C100.1@5.715,17.224 5.747,17.256 B101.1@8.341,17.256 ; B101.8@12.741,16.256 14.681,16.256 14.961,15.977 v1(15.773,15.977)
  Bottom Layer w0.15: J101.2@2.819,7.29 3.006,7.477 3.006,8.543 3.683,9.22 5.004,9.22 5.537,9.754 5.537,14.3 4.648,15.189 4.648,17.348 v1(5.69,18.39) 15.113,18.39 15.773,17.729 v1(15.773,15.977)
FILTRE_D_6_N: D600.4 J600.A7 J600.B7 L600.3 | length 10.7
  Top Layer w0.303: J600.B7@4.788,25.451 4.824,25.451 5.608,24.667 6.072,24.667 J600.A7@6.138,24.601 6.204,24.667 6.45,24.667 6.475,24.693 8.712,24.693 8.981,24.423 ; D600.4@8.981,23.77 8.981,24.423 ; L600.3@13.368,23.669 13.22,23.817 13.22,24.5 13.042,24.677 9.159,24.677 8.981,24.5 8.981,24.423
FILTRE_D_6_P: D600.3 J600.A6 J600.B6 L600.4 | length 10.2
  Top Layer w0.303: J600.A6@6.138,25.451 6.185,25.498 8.68,25.498 8.858,25.676 ; D600.3@8.981,26.37 8.981,25.64 9.159,25.462 12.712,25.462 13.368,26.119 L600.4@13.368,26.369
  Bottom Layer w0.15: J600.B6@4.788,24.601 4.824,24.601 5.608,25.385 6.072,25.385 J600.A6@6.138,25.451